# Altium PCB Velvet ADC module.PcbDoc
Units mm, origin at the board's own origin, x right, y up, seen from the top; angles counter-clockwise.
Board outline 100 x 44 mm, 2 copper layers (Top Layer, Bottom Layer); 37 components, 21 nets, 111 pads, 7 vias.
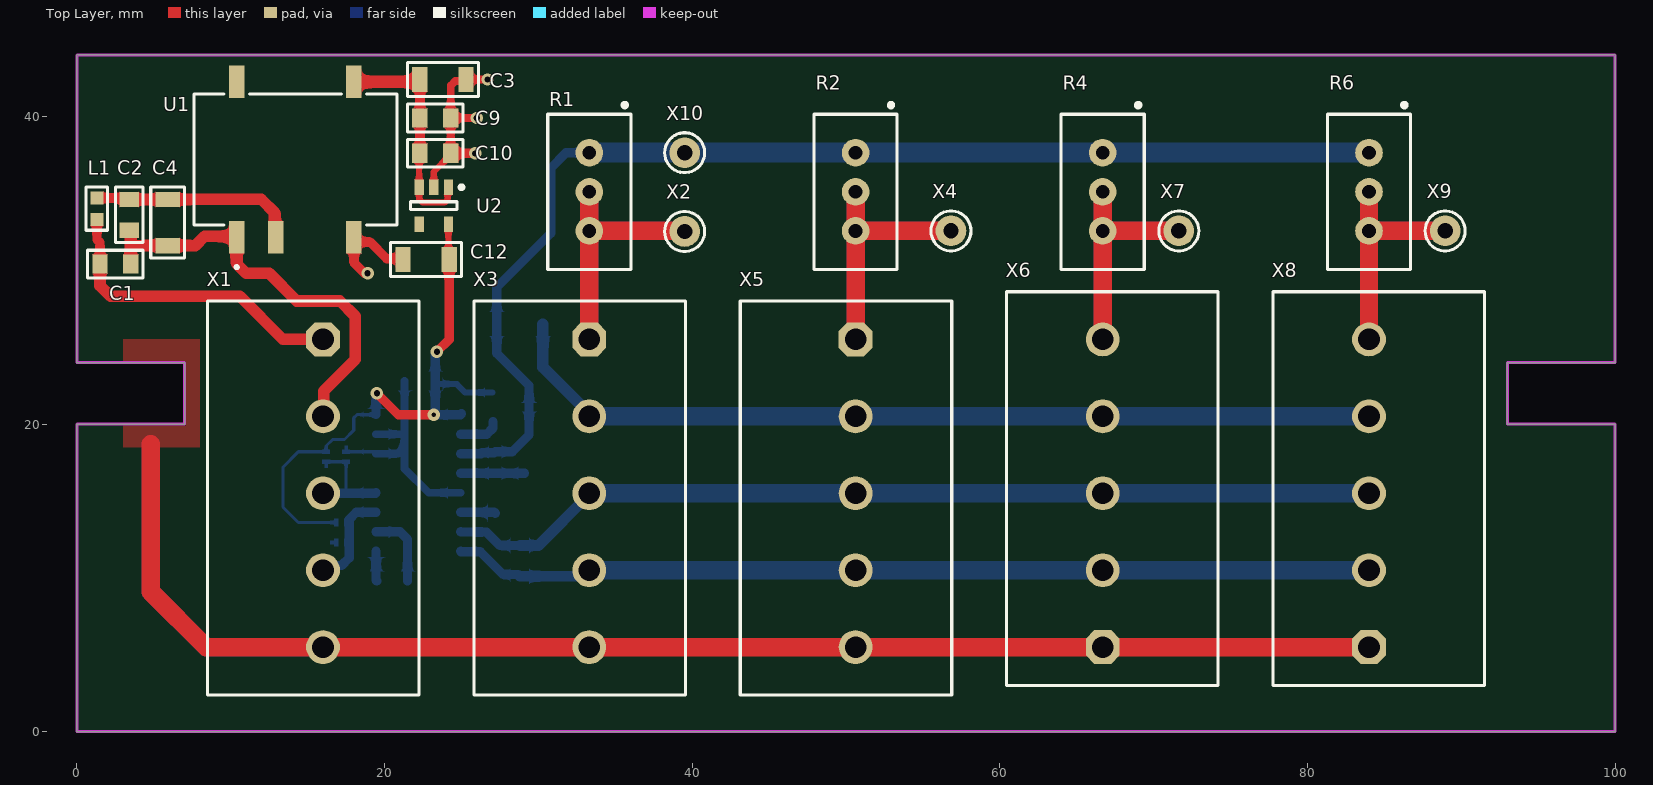
[diagram p0: Top Layer view]
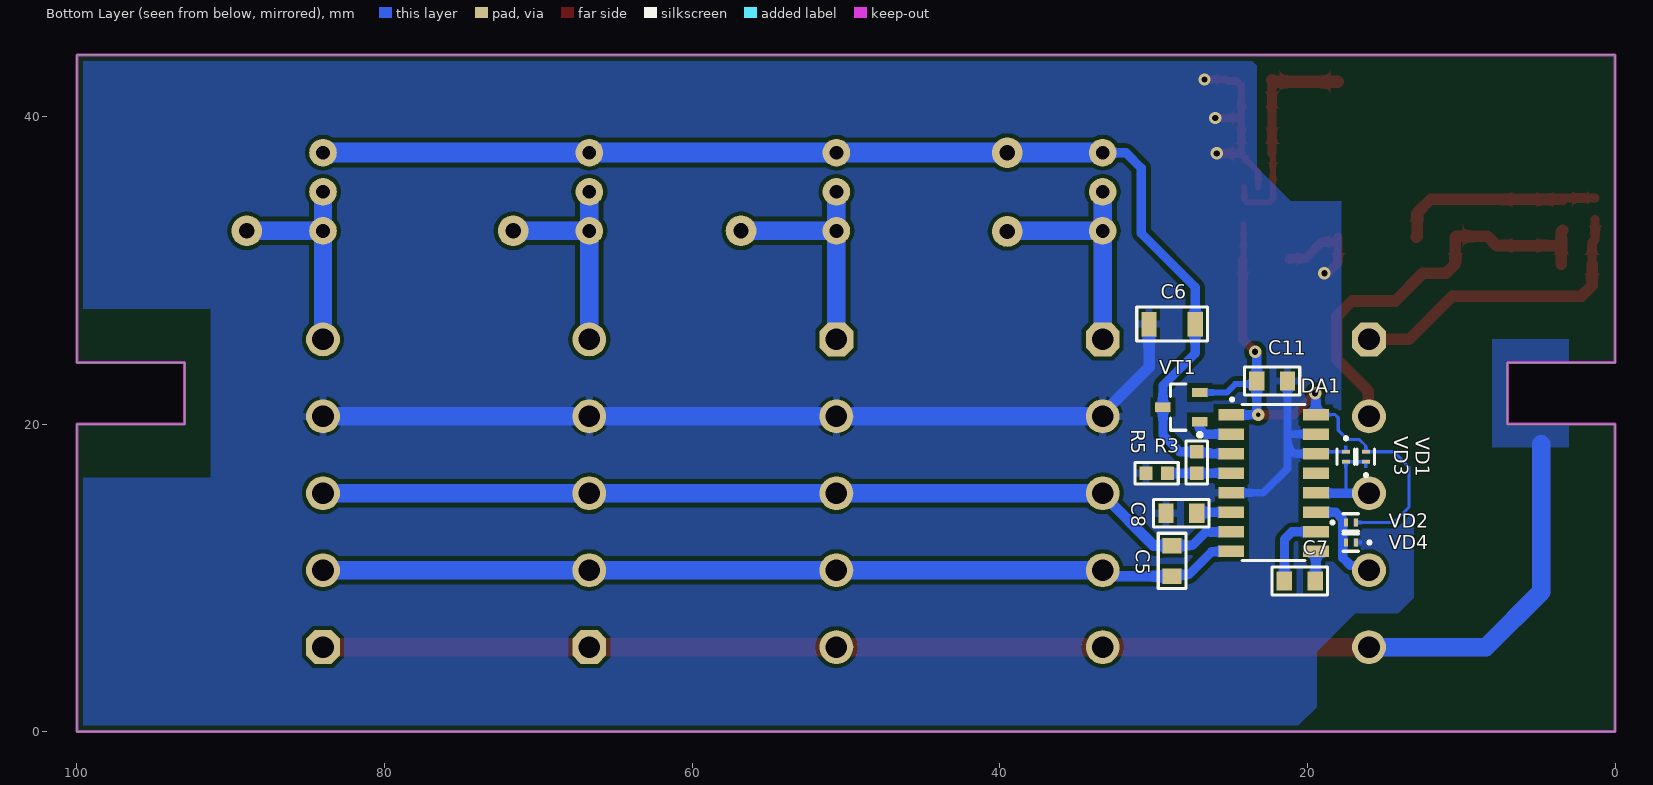
[diagram p1: Bottom Layer view, seen from below]

## Layer stack, top to bottom
Top Solder: solder mask 0.0102, Solder Resist, Dk 3.5
Top Layer: signal copper 0.0356
Dielectric 1: dielectric 0.32, FR-4, Dk 4.8
Bottom Layer: signal copper 0.0356
Bottom Solder: solder mask 0.0102, Solder Resist, Dk 3.5

## Board outline
0,0 0,20 7,20 7,24 0,24 0,44 100,44 100,24 93,24 93,20 100,20 100,0

## Design rules (kind name [scope] priority, off if disabled: settings)
BoardOutlineClearance BoardOutlineClearance_1 [InNamedPolygon('Earth')] p1: gap=0 ignorepadtopadclearanceinfootprint=FALSE
BoardOutlineClearance [All] p2 off: gap=0.4 ignorepadtopadclearanceinfootprint=FALSE
Clearance Clearance_Polygon_HV [InNamedPolygon('Earth')] p1: gap=0 ignorepadtopadclearanceinfootprint=FALSE
Clearance Clearance_MultiLayerPad [OnLayer('Multi-Layer') and IsPad] p2: gap=0.25 ignorepadtopadclearanceinfootprint=FALSE except(0: Arc-Hole Track-Hole SMDPad-Hole THPad-Hole Via-Hole Fill-Hole Poly-Hole Region-Hole Text-Hole)
Clearance Clearance_Polygon [InPolygon] p3: gap=0.3 ignorepadtopadclearanceinfootprint=FALSE except(0: Arc-Hole Track-Hole SMDPad-Hole THPad-Hole Via-Hole Fill-Hole Poly-Hole Region-Hole Text-Hole)
Clearance Clearance_Bottom [OnLayer('BOT+PWR') vs OnLayer('BOT+PWR')] p4: gap=0.2 ignorepadtopadclearanceinfootprint=FALSE
Clearance [All] p5: gap=0.3 ignorepadtopadclearanceinfootprint=FALSE
ComponentClearance ComponentClearance_U9 [InComponent('U9')] p1: gap=0 collisioncheckmode=3 verticalgap=0 showdistances=FALSE
ComponentClearance ComponentClearance_X5_X6 [InComponent('X5') vs InComponent('X6')] p2: gap=0 collisioncheckmode=3 verticalgap=0 showdistances=FALSE
ComponentClearance ComponentClearance_D3_D4 [InComponent('D3') vs InComponent('D4')] p3: gap=0 collisioncheckmode=3 verticalgap=0 showdistances=FALSE
ComponentClearance ComponentClearance_X2_X3 [InComponent('X2') vs InComponent('X3')] p4: gap=0 collisioncheckmode=3 verticalgap=0 showdistances=FALSE
ComponentClearance ComponentClearance_X3_X4 [InComponent('X4') vs InComponent('X3')] p5: gap=0 collisioncheckmode=3 verticalgap=0 showdistances=FALSE
ComponentClearance ComponentClearance_U7_U10 [InComponent('U7') vs InComponent('U10')] p6: gap=0 collisioncheckmode=3 verticalgap=0 showdistances=FALSE
ComponentClearance ComponentClearance_U9_U15 [InComponent('U9') vs InComponent('U15')] p7: gap=0 collisioncheckmode=3 verticalgap=0 showdistances=FALSE
ComponentClearance ComponentClearance_U15_R52 [InComponent('U14') vs InComponent('R61')] p8: gap=0 collisioncheckmode=3 verticalgap=0 showdistances=FALSE
ComponentClearance ComponentClearance_U16_U8 [InComponent('U16') vs InComponent('U8')] p9: gap=0 collisioncheckmode=3 verticalgap=0 showdistances=FALSE
ComponentClearance ComponentClearance_J1 [InComponent('J1') vs InComponent('J1')] p10: gap=0 collisioncheckmode=3 verticalgap=0 showdistances=FALSE
ComponentClearance [All] p11: gap=0.254 collisioncheckmode=3 verticalgap=0.254 showdistances=FALSE
Height Height_VT1 [InComponent('VT1')] p1: minheight=0 maxheight=28 prefheight=12.7
Height Height_FU1 [InComponent('FU1')] p2: minheight=0 maxheight=35 prefheight=12.7
Height Height_FU2 [InComponent('FU2')] p3: minheight=0 maxheight=35 prefheight=12.7
Height Height_VT2 [InComponent('VT2')] p4: minheight=0 maxheight=28 prefheight=12.7
Height Height_VT4 [InComponent('VT4')] p5: minheight=0 maxheight=28 prefheight=12.7
Height Height_VT5 [InComponent('VT5')] p6: minheight=0 maxheight=28 prefheight=12.7
Height [All] p7: minheight=0 maxheight=25.4 prefheight=12.7
HoleToHoleClearance [All] p1: gap=0.2 allowstackedmicrovias=TRUE
MinimumSolderMaskSliver [All] p1: minsoldermaskwidth=0
PlaneClearance PlaneClearance_HV [InNetClass('HighVoltage')] p1: clearance=2
PlaneClearance [All] p2: clearance=1
PlaneConnect [All] p1: pad.planeconnectstyle=Relief pad.reliefexpansion=0.5 pad.reliefentries=4 pad.reliefconductorwidth=0.5 pad.reliefairgap=2 via.planeconnectstyle=Direct via.reliefexpansion=0.5 via.reliefentries=4 via.reliefconductorwidth=0.5 via.reliefairgap=0.2
PolygonConnect PolygonConnect_PadGND [InNet('GND') and IsPad] p1: connectstyle=Relief reliefconductorwidth=0.5 reliefentries=4 polygonreliefangle="90 Angle" airgapwidth=0.2
PolygonConnect PolygonConnect_Via [IsVia] p2: connectstyle=Direct reliefconductorwidth=0.254 reliefentries=4 polygonreliefangle="90 Angle" airgapwidth=0.254
PolygonConnect [All] p3: connectstyle=Relief reliefconductorwidth=0.3 reliefentries=4 polygonreliefangle="90 Angle" airgapwidth=0.2
RoutingVias [All] p1: holewidth=0.4 width=0.8 viastyle="Through Hole" minholewidth=0.3 minwidth=0.7 maxholewidth=10 maxwidth=10
SilkToSilkClearance [All] p1: silktosilkclearance=0
SilkToSolderMaskClearance [IsPad] p1: minsilkscreentomaskgap=0 clearancetoexposedcopper=TRUE
SolderMaskExpansion [All] p1: expansion=0.075 istentingtop=FALSE
Width [All] p1: maxlimit=10 minlimit=0.125 preferedwidth=0.2
22 further rules are at their usual default settings.

## Components (designator, comment, footprint, x,y, rotation, side; value= is the part's Value field where it differs from the comment)
C1 "4.7uF" CH0805C 2.5,30.4 r0 top
C2 "4.7uF" CH0805C 3.4,33.6 r270 top
C3 "10uF" CH1206C 23.8,42.4 r0 top
C4 "2.2uF" CH1206C 5.9,33.1 r270 top
C5 "0.1uF" CH0805C 28.8,11.1 r90 bottom
C6 "10uF" CH1206C 28.8,26.5 r0 bottom
C7 "0.1uF" CH0805C 20.5,9.8 r180 bottom
C8 "0.1uF" CH0805C 28.2,14.2 r0 bottom
C9 "4.7uF" CH0805C 23.3,39.9 r0 top
C10 "0.1uF" CH0805C 23.3,37.6 r0 top
C11 "0.1uF" CH0805C 22.3,22.8 r180 bottom
C12 "2.2uF" CH1206C 22.7,30.7 r180 top
DA1 "HX711" 16-SOP 22.2,16.2 r180 bottom
L1 "6.8uH" CH0603L 1.3,34 r270 top
R1 "" "RES: 3296W" 33.312,37.64 r270 top
R2 "" "RES: 3296W" 50.625,37.64 r270 top
R3 "20K" CH0603R 27.2,17.5 r90 bottom
R4 "" "RES: 3296W" 66.687,37.64 r270 top
R5 "8.2K" CH0603R 29.8,16.8 r180 bottom
R6 "" "RES: 3296W" 84,37.64 r270 top
U1 "PDS1-S12-S9-M-TR" B1205XT-1WR3-TR 14.2,37.2 r90 top
U2 "XC6204B502MR-G" SOT23-5 23.2,34.2 r270 top
VD1 "SP3031-01ETG" SOD-882 16.2,17.875 r90 bottom
VD2 "SP3031-01ETG" SOD-882 17.175,13.6 r180 bottom
VD3 "SP3031-01ETG" SOD-882 17.5,17.875 r270 bottom
VD4 "SP3031-01ETG" SOD-882 17.175,12.3 r0 bottom
VT1 "MMSS8550-L-TP" SOT23_132 28.2,21.1 r0 bottom
X1 "796690-5" "CON: 796690-5" 16,15.5 r270 top
X2 "" "CON: PADS 1x1mm" 39.512,32.52 r180 top
X3 "796690-5" "CON: 796690-5" 33.312,15.5 r270 top
X4 "" "CON: PADS 1x1mm" 56.825,32.56 r180 top
X5 "796690-5" "CON: 796690-5" 50.625,15.5 r270 top
X6 "796690-5" "CON: 796690-5" 66.687,15.5 r90 top
X7 "" "CON: PADS 1x1mm" 71.637,32.56 r180 top
X8 "796690-5" "CON: 796690-5" 84,15.5 r90 top
X9 "" "CON: PADS 1x1mm" 88.95,32.56 r0 top
X10 "" "CON: PADS 1x1mm" 39.512,37.64 r180 top

## Footprints (in the part's own frame and the unit in brackets; to place one, negate y for a bottom-side part, rotate by r counter-clockwise, add the part's x,y. Pads: shape width x height; smd on the part's side, far side on the other; paste and mask are expansions set on the pad)
16-SOP [mm]
  rect 1.67x0.76 smd: 1(-2.75,4.415) 2(-2.75,3.145) 3(-2.75,1.875) 4(-2.75,0.605) 5(-2.75,-0.665) 6(-2.75,-1.935) 7(-2.75,-3.205) 8(-2.75,-4.475) 9(2.75,-4.475) 10(2.75,-3.205) 11(2.75,-1.935) 12(2.75,-0.665) 13(2.75,0.605) 14(2.75,1.875) 15(2.75,3.145) 16(2.75,4.415)
  silkscreen extent -2.8,-5.07 2.05,5.5, body extent -3.09,-5.02 3.14,4.97, height 1.59
B1205XT-1WR3-TR [mm] "DC DC CONVERTER 5V 1W"
  rect 2.1x1 smd: 1(-5.05,3.81) 2(-5.05,1.27) 4(-5.05,-3.81) 5(5.05,-3.81) 8(5.05,3.81)
  silkscreen extent -7.1,-6.6 4.25,6.6, body extent -5.7,-6.6 5.7,6.6, height 7.25
CH0603L [mm]
  rect 0.85x0.85 smd: 1(-0.7,0) 2(0.7,0)
  silkscreen extent -1.4,-0.7 1.4,0.7, body extent -0.8,-0.4 0.8,0.4, height 0.8
CH0603R [mm]
  rect 0.85x0.85 smd: 1(-0.7,0) 2(0.7,0)
  silkscreen extent -1.4,-0.7 1.4,0.7, body extent -0.8,-0.4 0.8,0.4, height 0.44
CH0805C [mm] "Chip Capacitor, 2-Leads, Body 2,00x1,20mm, IPC Medium Density"
  rect 1x1.25 smd: 1(-1,0) 2(1,0)
  silkscreen extent -1.8,-0.9 1.8,0.9, body extent -1,-0.62 1,0.63, height 0.78
CH1206C [mm] "Non polar chip capacitor, size 1206"
  rect 1x1.6 smd: 1(-1.5,0) 2(1.5,0)
  silkscreen extent -2.3,-1.1 2.3,1.1, body extent -1.6,-0.8 1.6,0.8, height 1
"CON: 796690-5" [mm] "5 Position Wire to Board Terminal Block 45°"
  oct 2.2x2.2 hole 1.4: 1(-10,0)
  round 2.2 hole 1.4: 2(-5,0) 3(0,0) 4(5,0) 5(10,0)
  silkscreen extent -12.5,-7.5 13.1,6.25, body extent -12.5,-7.45 13.05,6.25, height 15.5
"CON: PADS 1x1mm" [mm]
  round 2 hole 1: 1(0,0)
  silkscreen extent -1.3,-1.3 1.3,1.3
"RES: 3296W" [mm]
  round 1.8 hole 0.9: 1(0,0) 2(2.54,0) 3(5.08,0)
  silkscreen extent -3.12,-2.7 7.6,2.7, body extent -2.22,-2.4 7.31,2.4, height 11.55
SOD-882 [mm]
  rect 0.25x0.5 smd mask+0: 1(-0.325,0) 2(0.325,0)
  Top Layer region: 0.45,0.1 0.7,0.1 0.7,-0.1 0.45,-0.1 0.45,-0.25 0.2,-0.25 0.2,0.25 0.45,0.25
  Top Layer region: -0.2,-0.25 -0.45,-0.25 -0.45,-0.1 -0.7,-0.1 -0.7,0.1 -0.45,0.1 -0.45,0.25 -0.2,0.25
  silkscreen extent -1.3,-0.57 0.5,0.57, body extent -0.49,-0.29 0.49,0.29, height 0.48
SOT23-5 [mm] "SOT23, 5-Leads, Body 2,90x2,80mm, Pitch 0,95mm, IPC Medium Density"
  rect 1x0.6 smd: 1(-1.2,0.95) 2(-1.2,0) 3(-1.2,-0.95) 4(1.2,-0.95) 5(1.2,0.95)
  round 0.5 on Mech13: ""(-1.1,1.1)
  silkscreen extent -1.32,-1.5 0.25,1.93, body extent -1.5,-1.5 1.5,1.5, height 1.3
SOT23_132 [mm] "SOT23, 3-Leads, Body 3,0x2,6mm (max), Pitch 0,95mm, IPC Medium Density"
  rect 1x0.6 smd: 1(-1.2,0.95) 2(-1.2,-0.95) 3(1.2,0)
  round 0.5 on Mech13: ""(-0.9,1.1)
  silkscreen extent -1.32,-1.5 0.7,1.92, body extent -1.32,-1.52 1.32,1.52, height 1.12

## Part data
C1 C2 C9: library part Capacitor, "4.7 µF ±10% 50V Ceramic Capacitor X5R 0805 (2012 Metric)", Case Code (Imperial)=0805, Case Code (Metric)=2012, Dielectric=X7R, Manufacturer="TDK Corporation", Manufacturer Part Number=C2012X5R1H475K125AB, Max Operating Temperature=125°C, Min Operating Temperature=-55°C, Resistor Type=Ceramic, Supplier Part Number 1=7883041, Tolerance=5%, Voltage Rating=16V, Case/Package=0805, Category="Ceramic Capacitors", ComponentKind="0805 (2012 Metric)", ComponentLink1Description=https://datasheet.ciiva.com/26918/getdatasheetpartid-755584-26918332.pdf?src-supplier=Verical, ComponentLink1URL=https://datasheet.ciiva.com/26918/getdatasheetpartid-755584-26918332.pdf?src-supplier=Verical, Depth=1.25mm, Halogen Free="Halogen Free", HelpURL=https://www.digikey.com/en/products/detail/tdk-corporation/C2012X5R1H475K125AB/2443458, Lead Free="Lead Free", Length=2mm, Model=C2012X5R1H475K125AB, Mount="Surface Mount", Packaging="Tape and Reel", Pricing="1=0,12000, 10=0,08400, 50=0,04760, 100=0,03950, 500=0,02768, 1000=0,02291 (USD)", Radiation Hardening=No, RoHS=Yes, RoHS Compliant=Yes, Series=CC, Stock=24921, Supplier 1=RSComponents, Termination=SMD/SMT, Thickness=0.037inch, Voltage Rating (DC)=16V, Weight=0.000194oz, Width=0.049inch
C3 C6: library part Capacitor, "Cap Ceramic 10uF 16V X7R 20% SMD 1206 125°C Embossed T/R", Case Code (Imperial)=1206, Case Code (Metric)=3216, Dielectric=X7R, Manufacturer="Samsung Electro-Mechanics", Manufacturer Part Number=CL31B106MOHNNNE, Max Operating Temperature=125°C, Min Operating Temperature=-55°C, Supplier Part Number 1=1276-6641-1-ND, Tolerance=20%, Voltage Rating=16V, Capacitance=10uF, Case/Package=1206, Category="Ceramic Capacitors", ComponentKind="1206 (3216 Metric)", ComponentLink1Description=http://www.samsungsem.com/kr/support/product-search/mlcc/CL31B106MOHNNNE.jsp?src-supplier=Digi-Key, ComponentLink1URL=http://www.samsungsem.com/kr/support/product-search/mlcc/CL31B106MOHNNNE.jsp?src-supplier=Digi-Key, HelpURL=https://www.digikey.com/en/products/detail/samsung-electro-mechanics/CL31B106MOHNNNE/5961125, Length=0.126inch, Model=CL31B106MOHNNNE, Mount="Surface Mount", Packaging="Tape and Reel", Pricing="1=0,22000, 10=0,15000, 50=0,09000, 100=0,07600, 500=0,05202, 1000=0,04602 (USD)", RoHS=Yes, RoHS Compliant=Yes, Stock=1126, Supplier 1=Digi-Key, Thickness=0.071inch, Voltage Rating (DC)=16V, Width=0.063inch
C4 C12: library part Capacitor, Manufacturer="Samsung Electro-Mechanics", Supplier Part Number 1=CL31B225KOHNNNE, ComponentKind="1206 (3216 Metric)", HelpURL=https://www.digikey.com/en/products/detail/samsung-electro-mechanics/CL31B225KOHNNNE/3886922, Model=CL31B225KOHNNNE, Supplier 1=Avnet
C5 C7 C8 C10 C11: library part Capacitor, "Surface Mount Ceramic Multilayer Capacitor 0.1uF 5% X7R 16V 0805 Paper T/R", Capacitance=100nF, Case Code (Imperial)=0805, Case Code (Metric)=2012, Dielectric=X7R, Manufacturer=YAGEO, Manufacturer Part Number=CC0805JRX7R7BB104, Max Operating Temperature=125°C, Min Operating Temperature=-55°C, Resistor Type=Ceramic, Supplier Part Number 1=311-4266-1-ND, Tolerance=5%, Voltage Rating=16V, Case/Package=0805, Category="Ceramic Capacitors", ComponentKind="0805 (2012 Metric)", ComponentLink1Description=https://datasheet.ciiva.com/26918/getdatasheetpartid-755584-26918332.pdf?src-supplier=Verical, ComponentLink1URL=https://datasheet.ciiva.com/26918/getdatasheetpartid-755584-26918332.pdf?src-supplier=Verical, Depth=1.25mm, Halogen Free="Halogen Free", HelpURL=https://www.digikey.com/en/products/detail/yageo/CC0805JRX7R7BB104/5884101, Lead Free="Lead Free", Length=2mm, Model=CC0805JRX7R7BB104, Mount="Surface Mount", Packaging="Tape and Reel", Pricing="1=0,12000, 10=0,08400, 50=0,04760, 100=0,03950, 500=0,02768, 1000=0,02291 (USD)", Radiation Hardening=No, RoHS=Yes, RoHS Compliant=Yes, Series=CC, Stock=24921, Supplier 1=Digi-Key, Termination=SMD/SMT, Thickness=0.037inch, Voltage Rating (DC)=16V, Weight=0.000194oz, Width=0.049inch
DA1: "ADC for Weigh Scales", Manufacturer="Avia Semiconductors", ComponentKind=SMD, Model=HX711
L1: library part Inductor, Manufacturer="TDK Corporation", Supplier Part Number 1=50AJ4270, ComponentKind="0603 (1608 Metric)", HelpURL=https://www.digikey.com/en/products/detail/tdk-corporation/MLZ1608M6R8WT000/10444788, Model=MLZ1608M6R8WT000, Supplier 1=Newark
R1 R2 R4 R6: library part "ADJ resistor"
R3: library part Resistor, Manufacturer=YAGEO, Supplier Part Number 1=1995491, ComponentKind="0603 (1608 Metric)", HelpURL=https://www.digikey.com/en/products/detail/yageo/RC0603FR-0720KL/727040, Model=RC0603FR-0720KL, Supplier 1=RSComponents
R5: library part Resistor, Manufacturer=YAGEO, Supplier Part Number 1=1995642, ComponentKind=https://www.digikey.com/en/products/detail/yageo/RC0603FR-078K2L/727390, HelpURL=https://www.digikey.com/en/products/detail/yageo/RC0603FR-078K2L/727390, Model=RC0603FR-078K2L, Supplier 1=RSComponents
U1: "Isolated Module DC DC Converter 1 Output 9V - - - 111mA 10.8V - 13.2V Input", Manufacturer="CUI Inc.", Supplier Part Number 1=490-PDS1-S12-S9-M-TR, HelpURL=https://www.digikey.com/en/products/detail/cui-inc/PDS1-S12-S9-M-TR/4006938, Model=PDS1-S12-S9-M-TR, Supplier 1=Mouser
U2: "Linear Voltage Regulator IC Positive Fixed 1 Output 150mA SOT-25-5", Manufacturer="Torex Semiconductor Ltd", Supplier Part Number 1=84AH0809, HelpURL=https://www.digikey.com/en/products/detail/torex-semiconductor-ltd/XC6204B502MR-G/2138109, Model=XC6204B502MR-G, Supplier 1=Newark
VD1 VD2 VD3 VD4: library part "Diod Zener", "7.5V (Typ) Clamp 5A (8/20µs) Ipp Tvs Diode Surface Mount SOD-882", Manufacturer="Littelfuse Inc.", Supplier Part Number 1=1713885, ComponentKind=SOD-882, HelpURL=https://www.digikey.com/en/products/detail/littelfuse-inc/SP3031-01ETG/3598390, Model=SP3031-01ETG, Supplier 1=RSComponents
VT1: library part PNP, "Bipolar", Manufacturer="Micro Commercial Co", Supplier Part Number 1=MMSS8550-L-TPMSCT-ND, ComponentKind=SOT-23, HelpURL=https://www.digikey.com/en/products/detail/micro-commercial-co/MMSS8550-L-TP/2827198, Model=MMSS8550-L-TP, Supplier 1=Digi-Key
X1 X3 X5 X6 X8: library part 5-Connector, Manufacturer="TE Connectivity AMP Connectors", Supplier Part Number 1=571-796690-5, ComponentKind="Through Hole", HelpURL=https://www.digikey.com/en/products/detail/te-connectivity-amp-connectors/796690-5/1827116, Model=796690-5, Supplier 1=Mouser
X2 X4 X7 X9 X10: library part 1-Connector

## Via types
v1: diameter 0.8, hole 0.4, Top Layer to Bottom Layer, tented both sides, 6 vias
v2: diameter 0.8, hole 0.3, Top Layer to Bottom Layer, tented both sides, 1 vias

## Nets (pads, with @x,y where several pads share a name; then routed paths per layer and width w, separated by ;. In a path a pad name is that pad's centre, name@x,y a point inside that pad or via, vN(x,y) a via of type N, cw(c..) or ccw(c..) an arc to the next point about the centre after c; other vN are vias at no path point)
AVDD: C6.1 DA1.3 R1.1 R2.1 R3.2 R4.1 R6.1 VT1.3 X10.1 | length 78.2
  Bottom Layer w0.6: DA1.3 26.275,18.075 26.339,18.139 27.139,18.139 R3.2 28.3,18.2 29.4,19.3 VT1.3 29.4,22.5 27.3,24.6 C6.1 27.3,28.9 30.8,32.4 30.8,36.64 31.8,37.64 R1.1
  Bottom Layer w1.3: R1.1 X10.1 R2.1 R4.1 R6.1
DOUT: DA1.12 VD1.1 VD3.2 X1.3 | length 6.9
  Bottom Layer w0.2: VD1.1 VD3.2 17.5,15.708 17.708,15.5
  Bottom Layer w0.6: X1.3 17.708,15.5 19.415,15.5 DA1.12
Earth: X1.5 X3.5 X5.5 X6.1 X8.1 | length 112.6
  Top Layer w1.2: 4.8,18.7 4.8,9.1 8.4,5.5 X1.5 X3.5 X5.5 X6.1 X8.1
  Bottom Layer w1.2: 4.8,18.7 4.8,9.1 8.4,5.5 X1.5
GND: C3.2 C6.2 C8.2 C9.2 C10.2 C11.2 C12.2 DA1.5 DA1.14 DA1.15 R5.1 U1.4 U2.2 VD3.1 VD4.1 X3.2 X5.2 X6.4 X8.4 | length 93.4
  Top Layer w0.4: U2.2 23.2,36.392 24.3,37.492 C10.2
  Top Layer w0.5: C10.2 C9.2 ; v1(26,39.9) C9.2 ; v1(26.7,42.4) C3.2 25.2,42.3 24.593,42.3 24.3,42.007 C9.2
  Top Layer w0.6: v1(18.9,29.8) 18.7,29.8 18.01,30.49 U1.4 18.01,32.041 18.21,31.841 19.059,31.841 20.151,30.749 21.151,30.749 C12.2 ; C10.2 v1(25.9,37.6)
  Bottom Layer w0.2: VD3.1 19.325,18.2 DA1.14
  Bottom Layer w0.5: DA1.14 20.875,18.075 21.3,18.5 ; DA1.15 21.245,19.345 21.3,19.4 ; C11.2 21.3,19.4 ; DA1.5 22.865,15.535 21.3,17.1 21.3,18.5 ; 21.3,18.5 21.3,19.4
  Bottom Layer w0.75: C6.2 30.3,23.7 33.312,20.688 X3.2
  Bottom Layer w1.2: X3.2 X5.2 X6.4 X8.4
GND_12V: C1.2 C2.2 C4.2 U1.1 X1.2 | length 27.7
  Top Layer w0.75: C2.2 3.5,32.5 3.5,31.7 ; C1.2 3.5,31.7 ; X1.2 16.038,20.538 16.038,22.138 18.1,24.2 18.1,27 17.1,28 14.3,28 12.5,29.8 11,29.8 10.39,30.41 U1.1 10.34,32.2 8.3,32.2 7.7,31.6 C4.2 3.6,31.6 3.5,31.7
NetC2_1: C2.1 C4.1 L1.1 U1.2 | length 13.6
  Top Layer w0.6: L1.1 3.3,34.7 C2.1
  Top Layer w0.75: C2.1 12,34.6 12.87,33.73 12.87,32.21 U1.2
NetC8_1: C8.1 DA1.6 | length 2.3
  Bottom Layer w0.6: DA1.6 27.135,14.265 C8.1
NetDA1_2: DA1.2 VT1.1 | length 2.7
  Bottom Layer w0.6: DA1.2 26.649,19.345 27.052,19.749 VT1.1@27.052,20.144
NetDA1_4: DA1.4 R3.1 R5.2 | length 4.2
  Bottom Layer w0.6: DA1.4 27.195,16.805 R3.1 R5.2
NetR1_2: R1.2 R1.3 X2.1 X3.1 | length 31.6
  Top Layer w1.2: X3.1 R1.3 ; R1.2 R1.3 ; X2.1 39.472,32.56 R1.3
  Bottom Layer w1.2: X3.1 R1.3 ; R1.2 R1.3 ; X2.1 39.472,32.56 R1.3
NetR2_2: R2.2 R2.3 X4.1 X5.1 | length 31.6
  Top Layer w1.2: X5.1 R2.3 ; R2.2 R2.3 ; X4.1 R2.3
  Bottom Layer w1.2: X5.1 R2.3 ; R2.2 R2.3 ; X4.1 R2.3
NetR4_2: R4.2 R4.3 X6.5 X7.1 | length 29.1
  Top Layer w1.2: X6.5 R4.3 ; R4.2 R4.3 ; X7.1 R4.3
  Bottom Layer w1.2: X6.5 R4.3 ; R4.2 R4.3 ; X7.1 R4.3
NetR6_2: R6.2 R6.3 X8.5 X9.1 | length 29.1
  Top Layer w1.2: X8.5 R6.3 ; R6.2 R6.3 ; X9.1 R6.3
  Bottom Layer w1.2: X8.5 R6.3 ; R6.2 R6.3 ; X9.1 R6.3
S1+: C5.1 DA1.8 X3.4 X5.4 X6.2 X8.2 | length 59.9
  Bottom Layer w0.6: DA1.8 24.975,11.7 26.227,11.7 27.715,10.213 28.687,10.213 C5.1
  Bottom Layer w0.7: C5.1 32.507,10.1 32.907,10.5 X3.4
  Bottom Layer w1.2: X3.4 X5.4 X6.2 X8.2
S1-: C5.2 DA1.7 X3.3 X5.3 X6.3 X8.3 | length 60.9
  Bottom Layer w0.6: DA1.7 24.966,12.979 26.621,12.979 27.5,12.1 C5.2
  Bottom Layer w0.7: C5.2 28.805,12.105 30.005,12.105 33.312,15.412 X3.3
  Bottom Layer w1.2: X3.3 X5.3 X6.3 X8.3
S2+: C7.1 DA1.10 | length 5
  Bottom Layer w0.6: DA1.10 21.005,12.995 21.5,12.5 C7.1
S2-: C7.2 DA1.9 | length 1.9
  Bottom Layer w0.6: DA1.9 19.45,9.85 C7.2
SCK: DA1.11 VD2.1 VD4.2 X1.4 | length 6.5
  Bottom Layer w0.6: X1.4 16.306,10.806 17.206,10.806 17.7,11.3 17.7,13.8 18.164,14.264 19.449,14.264 DA1.11
VCC_5V: C11.1 C12.1 DA1.1 DA1.16 U2.5 VD1.2 VD2.2 VT1.2 | length 39.1
  Top Layer w0.4: U2.5 24.15,30.75 C12.1
  Top Layer w0.6: v1(19.5,22) 20.9,20.6 v2(23.2,20.6) ; v1(23.4,24.7) 24.2,25.5 C12.1
  Bottom Layer w0.2: VD2.2 14.4,13.6 13.4,14.6 13.4,17.2 14.4,18.2 VD1.2 16.2,18.575 16.625,19 17.4,19 18,19.6 18,20.4 18.215,20.615 DA1.16
  Bottom Layer w0.4: C11.1 23.5,22.6 24.7,22.6 25.25,22.05 VT1.2
  Bottom Layer w0.6: DA1.16 19.45,22.023 19.5,22.073 v1(19.5,22) ; v1(23.4,24.7) 23.4,24.646 23.3,24.546 C11.1 23.3,20.754 23.2,20.654 v2(23.2,20.6) 24.935,20.6 DA1.1 DA1.1@25,20.665
VCC_9V: C3.1 C9.1 C10.1 U1.5 U2.1 U2.3 | length 15
  Top Layer w0.4: C10.1 22.25,37.55 U2.3 22.25,34.634 22.484,34.4 23.9,34.4 24.101,34.601 24.101,35.351 U2.1
  Top Layer w0.6: C10.1 C9.1 22.3,42.35 C3.1
  Top Layer w0.8: U1.5 22.2,42.25 C3.1@22.3,42.35
VCC_12V: C1.1 L1.2 X1.1 | length 20.3
  Top Layer w0.6: L1.2 1.3,32 1.5,31.8 C1.1
  Top Layer w0.75: C1.1 1.5,29 2.2,28.3 10.6,28.3 13.4,25.5 X1.1
pads on no net: DA1.13 U1.8 U2. U2.4 VT1.

## Polygon pours and split planes (outlines as drawn)
GND on Bottom Layer "GND" (solid, remove dead copper, pour order 4): 17.8,34.5 21.1,34.5 23.3,36.7 23.3,43.3 24,44 100,44 100,0 21,0 19.4,1.6 19.4,5.2 16.9,7.7 14.1,7.7 13.1,8.7 13.1,17.1 14.2,18.2 17.8,18.2
Earth on Bottom Layer "Earth" (solid, remove dead copper, pour order 0): 3,18.5 8,18.5 8,25.5 3,25.5
Earth on Top Layer "Earth" (solid, remove dead copper, pour order 3): 3,18.5 8,18.5 8,25.5 3,25.5

## Keep-outs
Keep-Out Layer:
  the board outline again, w0.2

## Other copper
Bottom Layer:
  pour cut-out: 100,27.5 100,16.5 91.3,16.5 91.3,27.5